# Altium PCB gongye-small-11-8-.PcbDoc
Units mm, origin at the board's own origin, x right, y up, seen from the top; angles counter-clockwise.
Board outline 14 x 21.4 mm, 2 copper layers (Top Layer, Bottom Layer), stack 0.98 mm thick; 30 components, 18 nets, 108 pads, 17 vias.
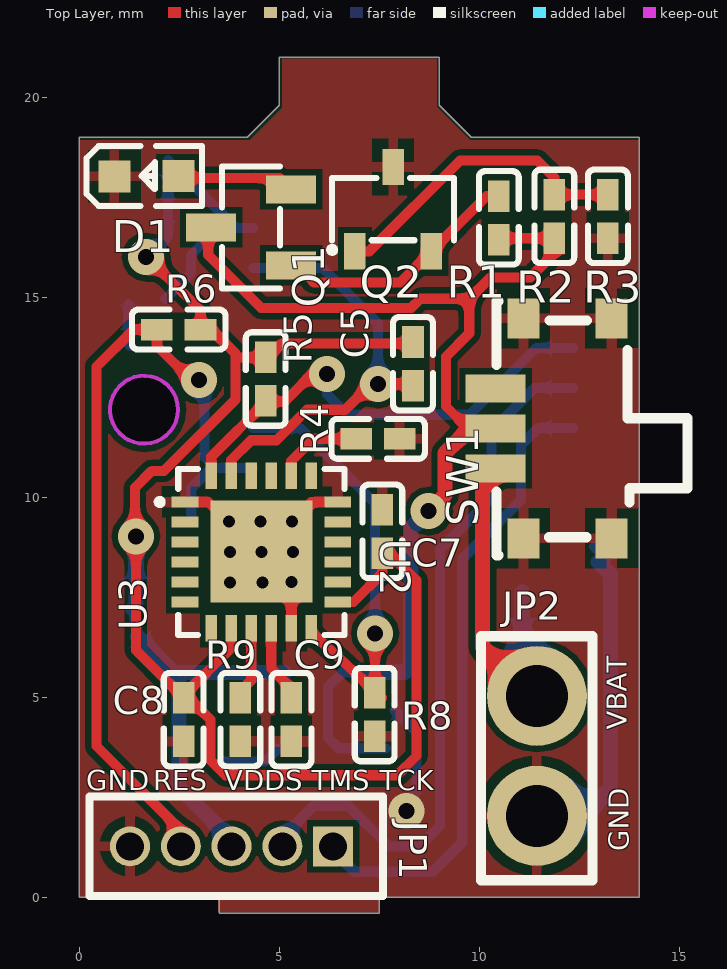
[diagram p0: Top Layer view]
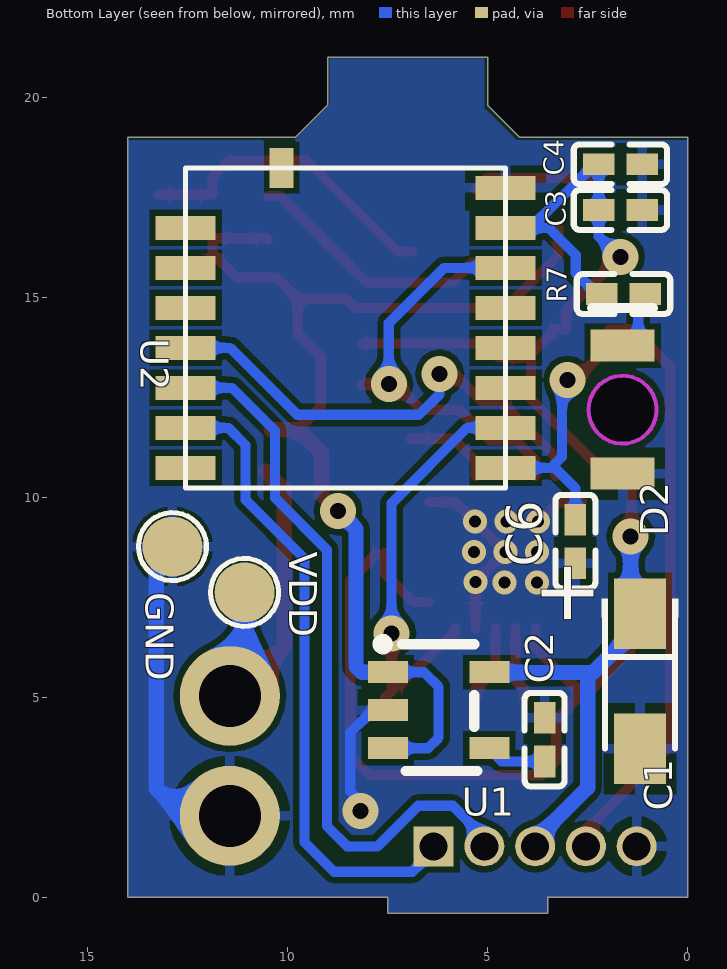
[diagram p1: Bottom Layer view, seen from below]
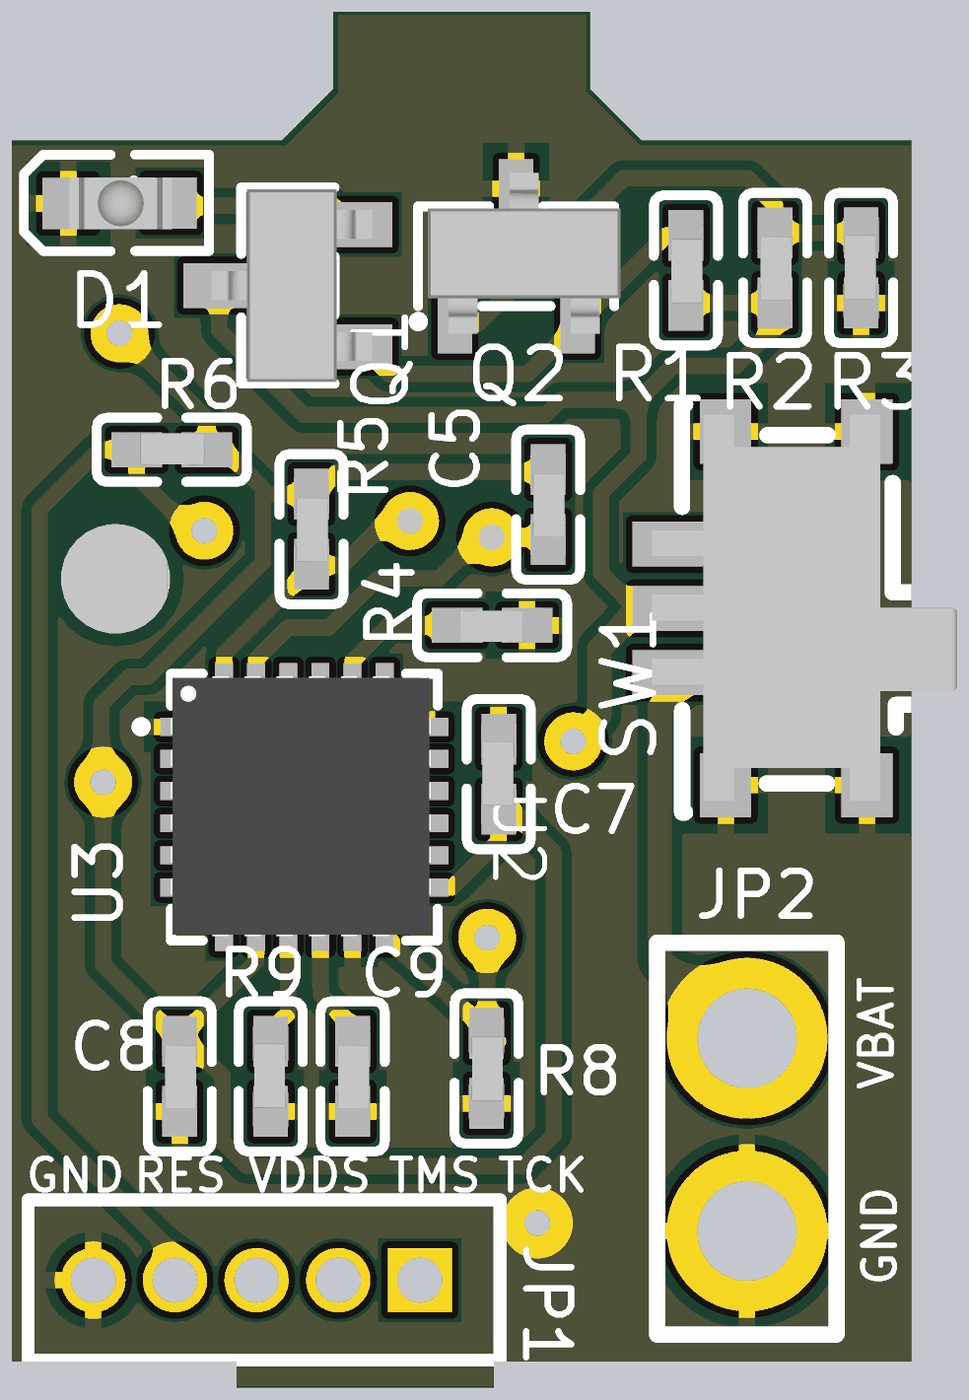
[diagram p2: 3D render of the assembled board from above, using the file's embedded part models]
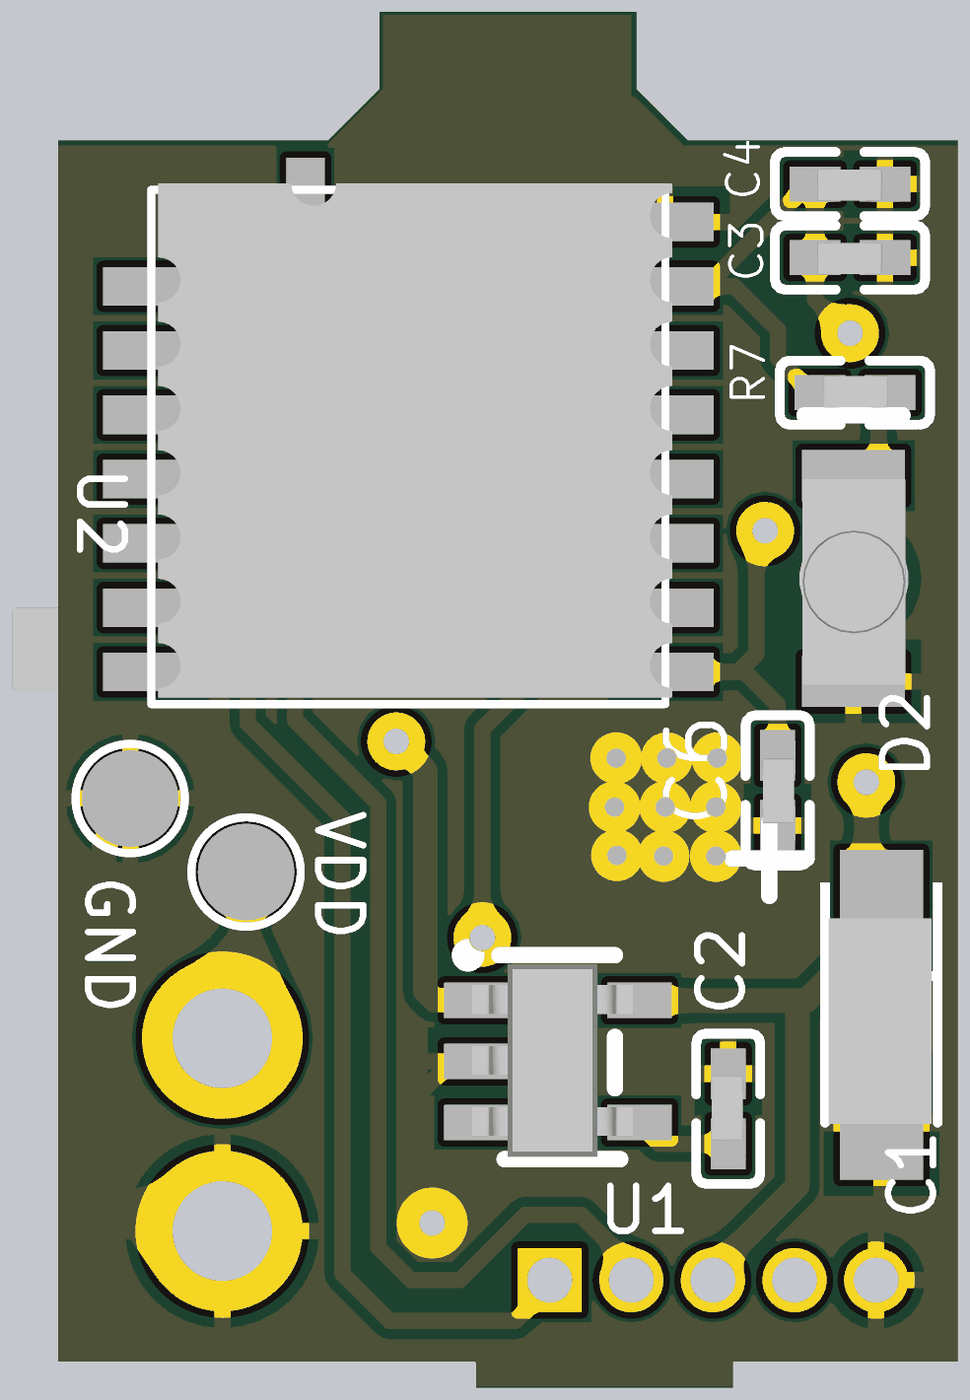
[diagram p3: 3D render of the assembled board from below, using the file's embedded part models]

## Layer stack, top to bottom
Top Solder: solder mask 0.01, Solder Resist, Dk 3.5
Top Layer: signal copper 0.035
Dielectric 1: dielectric 0.91, FR-4, Dk 4.8
Bottom Layer: signal copper 0.035
Bottom Solder: solder mask 0.01, Solder Resist, Dk 3.5

## Board outline
3.5,-0.4 3.5,0 0,0 0,19 4.2,19 5,19.8 5,21 9,21 9,19.8 9.8,19 14,19 14,0 7.5,0 7.5,-0.4
cut-out: 0.766,12.182 ccw(c1.616,12.182) 1.616,11.332 ccw(c1.616,12.182) 2.466,12.182 ccw(c1.616,12.182) 1.616,13.032 ccw(c1.616,12.182)

## Design rules (kind name [scope] priority, off if disabled: settings)
Clearance [All] p1: gap=0.15
ComponentClearance [All] p1: gap=0 collisioncheckmode=3 verticalgap=0 showdistances=FALSE
MinimumSolderMaskSliver [All] p1: minsoldermaskwidth=0
PolygonConnect PolygonConnect-isva [IsVia] p1: connectstyle=Direct reliefconductorwidth=0.254 reliefentries=4 polygonreliefangle="90 Angle" airgapwidth=0.254
PolygonConnect [All] p2: connectstyle=Relief reliefconductorwidth=0.254 reliefentries=4 polygonreliefangle="90 Angle" airgapwidth=0.254
RoutingVias [All] p1: holewidth=0.711 width=1.27 viastyle="Through Hole" minholewidth=0.711 minwidth=1.27 maxholewidth=0.711 maxwidth=1.27
SilkToSilkClearance [All] p1: silktosilkclearance=0
SilkToSolderMaskClearance [IsPad] p1: minsilkscreentomaskgap=0 clearancetoexposedcopper=TRUE
SolderMaskExpansion [All] p1: expansion=0.102
Width [All] p1: maxlimit=0.4 minlimit=0.1 preferedwidth=0.254
26 further rules are at their usual default settings.

## Components (designator, comment, footprint, x,y, rotation, side; value= is the part's Value field where it differs from the comment)
C1 "C  1μF TAN" "C 1uF tan" 1.099,5.328 r90 bottom
C2 "C 0.01μF" 0402-- 3.607,3.937 r90 bottom
C3 "C 2.2μF" 0402-- 1.676,17.145 r0 bottom
C4 "C 0.1μF" 0402-- 1.676,18.288 r0 bottom
C5 "C 2200pF" 0402-- 7.474,11.424 r180 top
C6 "C 1μF" 0402-- 2.769,8.89 r270 bottom
C7 "C 0.1μF" 0402-- 7.544,9.144 r90 top
C8 "C 0.01μF" 0402-- 2.648,4.439 r270 top
C9 "C 0.1μF" 0402-- 5.34,4.439 r270 top
D1 "D LED yellow" "D LED YELLOW-0603" 1.676,18.034 r0 top
D2 "D LED" LED-GREEN-BEIGUANG-1206 1.626,12.192 r90 bottom
GND "TP" TP-- 12.878,8.763 r180 bottom (schematic designator TP1)
JP1 "JP-5P" 5p-paizhen-1.27 3.817,1.277 r180 top
JP2 "JP-2P" 2p-cixi-hanpan-3mm 11.455,2.032 r90 top
Q1 "8050" 8050 4.369,16.764 r0 top
Q2 "TL431" TL431 7.823,17.145 r270 top
R1 "R  2K" 0402-- 10.525,16.981 r270 top
R2 "R 30K" 0402-- 11.913,17.018 r270 top
R3 "R 100K" 0402-- 13.183,17.018 r90 top
R4 "R 4.7k" 0402-- 8.382,13.335 r270 top
R5 "R 4.7k" 0402-- 2.489,14.224 r0 top
R6 "R 4.7k" 0402-- 4.699,12.954 r270 top
R7 "R 1K" 0402-- 1.6,15.113 r180 bottom
R8 "R  120Ω" 0402-- 7.423,4.566 r270 top
R9 "R  10K" 0402-- 3.994,4.439 r90 top
SW1 "mini-SW-2P" mini-sw-2P 12.319,11.684 r90 top
U1 "SPX3819-2-5" SPX3819 6.325,4.699 r180 bottom
U2 "RF-BM-4044B4" RF-BM-4044B4 8.712,13.843 r180 bottom
U3 "MPU6050" MPU6050 4.478,8.584 r270 top
VDD "TP" TP-- 11.074,7.62 r90 bottom (schematic designator TP2)

## Footprints (in the part's own frame and the unit in brackets; to place one, negate y for a bottom-side part, rotate by r counter-clockwise, add the part's x,y. Pads: shape width x height; smd on the part's side, far side on the other; paste and mask are expansions set on the pad)
2p-cixi-hanpan-3mm [mm]
  round 2.5 hole 1.55: 1(0.002,0.012) 2(3,0.012)
  silkscreen extent -1.61,-1.38 4.49,1.41
5p-paizhen-1.27 [mm]
  rect 1x1 hole 0.7: 1(-2.533,0.007)
  round 1 hole 0.7: 2(-1.263,0.007) 3(0.007,0.007) 4(1.277,0.007) 5(2.547,0.007)
  silkscreen extent -3.78,-1.24 3.56,1.25
0402-- [mm]
  rect 0.79x0.54 smd: 1(-0.545,-0.035) 2(0.545,-0.035)
  silkscreen extent -1.17,-0.53 1.17,0.46, body extent -0.49,-0.27 0.51,0.23, height 0.18
8050 [mm]
  rect 1.25x0.7 smd: 1(0.928,-0.971) 2(0.928,0.929) 3(-1.072,-0.021)
  silkscreen extent -0.8,-1.55 0.65,1.51, body extent -1.26,-1.52 1.24,1.48, height 1.1
"C 1uF tan" [mm]
  rect 1.758x1.296 smd: 1(1.756,0.089) 2(-1.616,0.089)
  silkscreen extent -1.61,-0.86 2.13,1.04, body extent -1.63,-0.69 1.57,0.91, height 1.6
"D LED YELLOW-0603" [mm]
  rect 0.8x0.8 smd: 1(-0.797,-0.013) 2(0.802,-0.006)
  silkscreen extent -1.49,-0.75 1.39,0.75, body extent -0.78,-0.41 0.82,0.39, height 0.95
LED-GREEN-BEIGUANG-1206 [mm]
  rect 0.8x1.6 smd: 1(-1.606,-0.003) 2(1.594,-0.003)
  Keep-Out Layer circle w0.1: c-0.006,-0.003 r0.85
  silkscreen extent 2.53,-0.76 2.53,0.76, body extent -1.66,-0.81 1.54,0.79
mini-sw-2P [mm]
  rect 0.7x1.5 smd: 1(-0.963,1.91) 2(0.037,1.91) 3(1.037,1.91)
  rect 1x0.8 smd: 4(-2.713,-0.99) 4(-2.713,1.21) 5(2.787,-0.99) 5(2.787,1.21)
  silkscreen extent -3.14,-2.89 3.21,1.89, body extent -2.95,-2.39 3.05,2.36, height 1.4
MPU6050 [mm]
  rect 0.28x0.665 smd: 1(-1.296,-1.833) 2(-0.796,-1.833) 3(-0.296,-1.833) 4(0.204,-1.833) 5(0.704,-1.833) 6(1.204,-1.833) 13(1.204,1.982) 14(0.704,1.982) 15(0.204,1.982) 16(-0.296,1.982) 17(-0.796,1.982) 18(-1.296,1.982)
  rect 0.665x0.28 smd: 7(1.861,-1.175) 8(1.861,-0.675) 9(1.861,-0.175) 10(1.861,0.325) 11(1.861,0.825) 12(1.861,1.325) 19(-1.954,1.325) 20(-1.954,0.825) 21(-1.954,0.325) 22(-1.954,-0.175) 23(-1.954,-0.675) 24(-1.954,-1.175)
  rect 2.55x2.55 smd: 25(-0.06,0.08)
  silkscreen extent -2.12,-2.54 2.03,2.15, body extent -2.08,-2 1.96,2.04, height 0.88
RF-BM-4044B4 [mm]
  rect 1.5x0.6 smd: 1(-3.838,2.89) 2(-3.838,1.89) 3(-3.838,0.89) 4(-3.838,-0.11) 5(-3.838,-1.11) 6(-3.838,-2.11) 7(-3.838,-3.11) 8(4.162,-3.11) 9(4.162,-2.11) 10(4.162,-1.11) 11(4.162,-0.11) 12(4.162,0.89) 13(4.162,1.89) 14(4.162,2.89) 15(4.162,3.89)
  rect 0.6x1 smd: 16(-1.438,4.39)
  silkscreen extent -3.84,-3.61 4.16,4.39, body extent -3.73,-3.51 4.27,4.49, height 2.1
SPX3819 [mm]
  rect 1x0.55 smd: 1(-1.169,0.925) 2(-1.169,-0.025) 3(-1.169,-0.975) 4(1.373,-0.975) 5(1.373,0.925)
  silkscreen extent -1.42,-1.55 1.07,1.75, body extent -1.23,-1.51 1.27,1.49, height 1.4
TL431 [mm]
  rect 0.91x0.535 smd: 1(1,-0.929) 2(1,0.981) 3(-1.11,0.026)
  silkscreen extent -0.83,-1.57 1.04,1.55, body extent -1.35,-1.35 1.15,1.65, height 1.05
TP-- [mm]
  round 1.5 smd: 1(0,0)
  silkscreen extent -0.85,-0.85 0.85,0.85

## Via types
v1: diameter 0.6, hole 0.3, Top Layer to Bottom Layer, 9 vias
v2: diameter 0.9, hole 0.4, Top Layer to Bottom Layer, 8 vias

## Nets (pads, with @x,y where several pads share a name; then routed paths per layer and width w, separated by ;. In a path a pad name is that pad's centre, name@x,y a point inside that pad or via, vN(x,y) a via of type N, cw(c..) or ccw(c..) an arc to the next point about the centre after c; other vN are vias at no path point)
GND: C1.2 C2.2 C3.1 C4.1 C5.1 C6.2 C7.2 C8.2 C9.2 D1.1 D2.1 GND.1 JP1.5 JP2.1 Q2.3 R3.1 R8.2 R9.1 SW1.4 SW1.5 U1.2 U2.15 U3.1 U3.11 U3.18 U3.25 | length 16.5
  Top Layer w0.254: U3.1 3.227,9.88 U3.25@3.461,9.646 ; U3.11 v1(5.303,7.88) v1(4.553,8.63) v1(5.315,9.392) 5.803,9.88 U3.18
  Bottom Layer w0.254: U1.2@7.881,4.667 8.433,4.116 8.433,2.642 v2@8.204,2.413 ; GND.1 GND.1@13.183,8.458
  Bottom Layer w0.381: JP2.1 12.601,2.034 13.284,2.718 13.284,8.077 GND.1@12.979,8.382
  other v1: 3.766,7.868 4.578,7.868 3.766,8.63 5.34,8.63 3.74,9.392 4.528,9.392
  other v2: 8.179,2.159
INT: R8.1 U2.9 U3.12 | length 11.3
  Top Layer w0.254: U3.12 5.803,6.62 7.412,5.136 R8.1@7.439,5.11 ; R8.1@7.566,4.983 R8.1@7.439,5.11 ; v2@7.566,6.429 v2(7.398,6.598) 7.398,5.152 R8.1@7.439,5.11
  Bottom Layer w0.254: U2.9@4.347,11.733 U2.9 5.514,11.733 7.398,9.849 v2(7.398,6.598)
JTAG_TCKC: JP1.1 U2.6 | length 15.6
  Bottom Layer w0.254: JP1.1@6.502,1.016 6.883,0.635 8.839,0.635 9.576,1.372 9.576,8.458 11.049,9.931 11.049,11.303 11.479,11.733 U2.6@12.347,11.733
JTAG_TMSC: JP1.2 U2.5 | length 17.8
  Bottom Layer w0.254: JP1.2@5.042,1.46 5.867,2.286 6.731,2.286 7.747,1.27 8.509,1.27 9.017,1.778 9.017,8.687 10.312,9.982 10.312,11.659 11.387,12.733 U2.5@12.347,12.733
NetC2_1: C2.1 U1.4 | length 1.5
  Bottom Layer w0.254: C2.1 4.65,3.392 U1.4@4.975,3.717
NetC5_2: C5.2 U3.20 | length 2.2
  Top Layer w0.254: U3.20 5.303,10.904 5.858,11.458 C5.2
NetC9_1: C9.1 U3.10 | length 1.9
  Top Layer w0.254: 4.803,5.84 U3.10 ; 4.811,5.84 4.811,5.707 5.28,5.237 C9.1@5.28,4.983
NetD1_2: D1.2 Q1.2 | length 3
  Top Layer w0.254: D1.2@2.398,17.982 5.008,17.982 Q1.2
NetD2_2: D2.2 R7.2 | length 1.1
  Bottom Layer w0.254: R7.2@1.233,14.824 1.233,13.82 D2.2@1.267,13.786
NetQ1_1: Q1.1 Q2.2 R1.1 | length 6.2
  Top Layer w0.254: Q1.1@5.373,15.87 5.875,15.367 8.027,15.367 Q2.2 10.186,17.526 R1.1
NetQ1_3: Q1.3 R1.2 R2.2 SW1.2 U1.1 U1.3 | length 29.5
  Top Layer w0.254: Q1.3@3.226,16.743 3.226,16.053 4.547,14.732 8.306,14.732 8.534,14.961 9.754,14.961 ; SW1.2 9.717,11.721 9.169,12.268 9.169,13.51 9.754,14.094 9.754,14.961 ; R1.2 10.527,16.473 R2.2 11.878,16.094 11.278,15.494 10.287,15.494 9.754,14.961
  Top Layer w0.381: v2(8.738,9.652) 9.144,10.058 9.144,11.1 9.728,11.684 SW1.2@10.409,11.684
  Bottom Layer w0.254: U1.3@7.205,3.717 U1.3@7.672,3.717 ; U1.3 6.487,3.724 6.223,3.988 6.223,5.258 6.589,5.624 U1.1
  Bottom Layer w0.381: U1.1 8.142,5.624 8.287,5.769 8.287,9.201 v2(8.738,9.652) v2@8.738,9.893
NetQ2_1: Q2.1 R2.1 R3.2 | length 7.9
  Top Layer w0.254: Q2.1 7.255,16.145 9.525,18.415 11.455,18.415 11.878,17.993 R2.1 R3.2
NetR9_2: R9.2 U3.9 | length 1.8
  Top Layer w0.254: R9.2@4.08,4.984 4.08,5.201 4.303,5.424 U3.9
NRESET: C6.1 JP1.4 R5.1 U2.8 | length 21.7
  Top Layer w0.254: R5.1@1.944,14.097 1.944,13.778 2.794,12.929 v2(2.997,12.929) ; R5.1 1.362,14.189 0.432,13.259 0.432,3.778 2.54,1.669 JP1.4
  Bottom Layer w0.254: C6.1@2.803,9.562 2.803,10.22 3.316,10.733 3.412,10.733 ; v2@2.871,12.7 v2@2.997,12.827 ; v2(2.997,12.929) v2@2.997,12.827 ; U2.8@4.347,10.733 3.412,10.733 ; v2@2.997,12.827 3.137,12.967 3.137,11.008 3.412,10.733
SCL: R4.2 U2.13 U3.23 | length 10.7
  Top Layer w0.254: U3.23 3.803,10.928 4.299,11.424 4.934,11.424 5.696,12.186 6.648,12.186 7.29,12.827 v2(7.468,12.827) 8.107,12.827 R4.2@8.144,12.79
  Bottom Layer w0.254: U2.13@4.347,15.733 U2.13 6.086,15.733 7.468,14.351 7.468,13.208 v2@7.264,13.005
SDA: R6.2 U2.4 U3.24 | length 11.5
  Top Layer w0.254: U3.24 3.303,11.012 4.682,12.391 5.139,12.391 5.829,13.081 v2(6.198,13.081)
  Bottom Layer w0.254: v2@6.198,12.827 6.198,12.573 6.712,12.059 9.76,12.059 11.434,13.733 U2.4@12.347,13.733
VBAT: JP2.2 SW1.1 VDD.1 | length 9
  Top Layer w0.381: SW1.1@10.558,10.654 10.084,10.18 10.084,6.248 JP2.2@11.252,5.08
  Bottom Layer w0.254: JP2.2@11.074,5.401 JP2.2
  Bottom Layer w0.381: JP2.2@11.074,5.401 VDD.1
VDDS: C1.1 C3.2 C4.2 C7.1 C8.1 JP1.3 R4.1 R5.2 R6.1 R7.1 U1.5 U2.14 U3.8 U3.13 | length 54.6
  Top Layer w0.254: v2@1.397,9.017 1.397,10.236 1.818,10.657 2.122,10.657 3.912,12.446 3.912,13.589 3.311,14.189 R5.2 3.035,14.669 1.702,16.002 v2(1.676,16.002) ; v2(1.422,9.017) 1.422,6.174 C8.1 ; U3.8 3.803,6.229 2.613,5.039 C8.1 ; 4.008,13.492 4.717,13.492 5.067,13.843 R4.1@8.144,13.843 ; U3.13 6.859,7.38 7.579,8.099 C7.1 ; C7.1@7.763,8.593 8.432,7.924 8.432,3.53 7.95,3.048 3.658,3.048 3.283,3.423 3.283,4.439 2.738,4.983 C8.1
  Bottom Layer w0.254: C1.1@1.34,7.211 1.358,7.115 1.359,7.106 1.367,7.066 C1.1@1.467,6.508 ; v2(1.676,16.002) 1.702,16.002 2.222,16.522 C3.2 C4.2 2.222,18.428 U2.14@3.917,16.733 ; R7.1@2.145,14.951 2.794,15.6 2.794,16.053 3.474,16.733 U2.14@3.917,16.733 ; 2.358,5.617 2.496,5.479 ; U2.14@4.347,16.733 U2.14@3.917,16.733
  Bottom Layer w0.381: C1.1@1.34,7.211 1.422,7.293 v2(1.422,9.017) ; C1.1@1.467,6.508 2.358,5.617 U1.5@5.129,5.617 ; 2.496,5.479 2.496,2.736 3.581,1.651 JP1.3@3.581,1.397
pads on no net: SW1.3 U2.1 U2.2 U2.3 U2.7 U2.10 U2.11 U2.12 U2.16 U3.2 U3.3 U3.4 U3.5 U3.6 U3.7 U3.14 U3.15 U3.16 U3.17 U3.19 U3.21 U3.22

## Polygon pours and split planes (outlines as drawn)
GND on Top Layer "Top Layer-No Net" (solid, remove dead copper, pour order 0): 0.025,18.923 4.216,18.923 4.267,18.923 5.029,19.685 5.08,19.736 5.08,20.955 8.941,20.955 8.941,19.812 8.941,19.761 9.779,18.923 13.995,18.923 13.995,0 7.493,0 7.493,-0.381 3.48,-0.381 3.48,0 0,0 0,18.898 0.025,18.923
GND on Bottom Layer "Top Layer-No Net" (solid, remove dead copper, pour order 2): 0,18.923 4.267,18.923 5.029,19.685 5.08,19.685 5.08,20.955 8.941,20.955 8.941,19.812 9.804,18.948 9.804,18.923 13.995,18.923 13.995,0 7.493,0 7.493,-0.381 3.48,-0.381 3.48,0 0,0 0,18.923

## Silkscreen, mask and mechanical layers (free items; w line width, h text height)
Top Overlay:
  text "VBAT" at 13.691,4.191 h0.5 r90
  text "GND" at 0.178,2.667 h0.5
  text "RES" at 1.854,2.667 h0.5
  text "VDDS" at 3.632,2.667 h0.5
  text "TMS" at 5.817,2.667 h0.5
  text "TCK" at 7.518,2.667 h0.5
  text "GND" at 13.741,1.143 h0.5 r90
Mechanical 1:
  circle w0.1: c1.616,12.182 r0.9
  lines w0.254: 0,0 3.5,0 3.5,-0.4 7.5,-0.4 7.5,0 14,0 14,3 14,19 10,19 9.8,19 9,19.8 9,21 5,21 5,19.8 4.2,19 4,19 0,19 0,3 0,0

## Text inside footprints (layer, text, board x,y; h text height)
C1: Bottom Overlay "+" at 2.339,6.718 h1.52 r270
U3: Top Overlay "U2" at 7.526,8.965 h0.76 r270